# Altium PCB 驱动.PcbDoc (part 2 of 3)
Units mm, origin at the board's own origin, x right, y up, seen from the top; angles counter-clockwise.
Board outline 185 x 120 mm, 2 copper layers (Top Layer, Bottom Layer); 132 components, 68 nets, 349 pads, 106 vias.
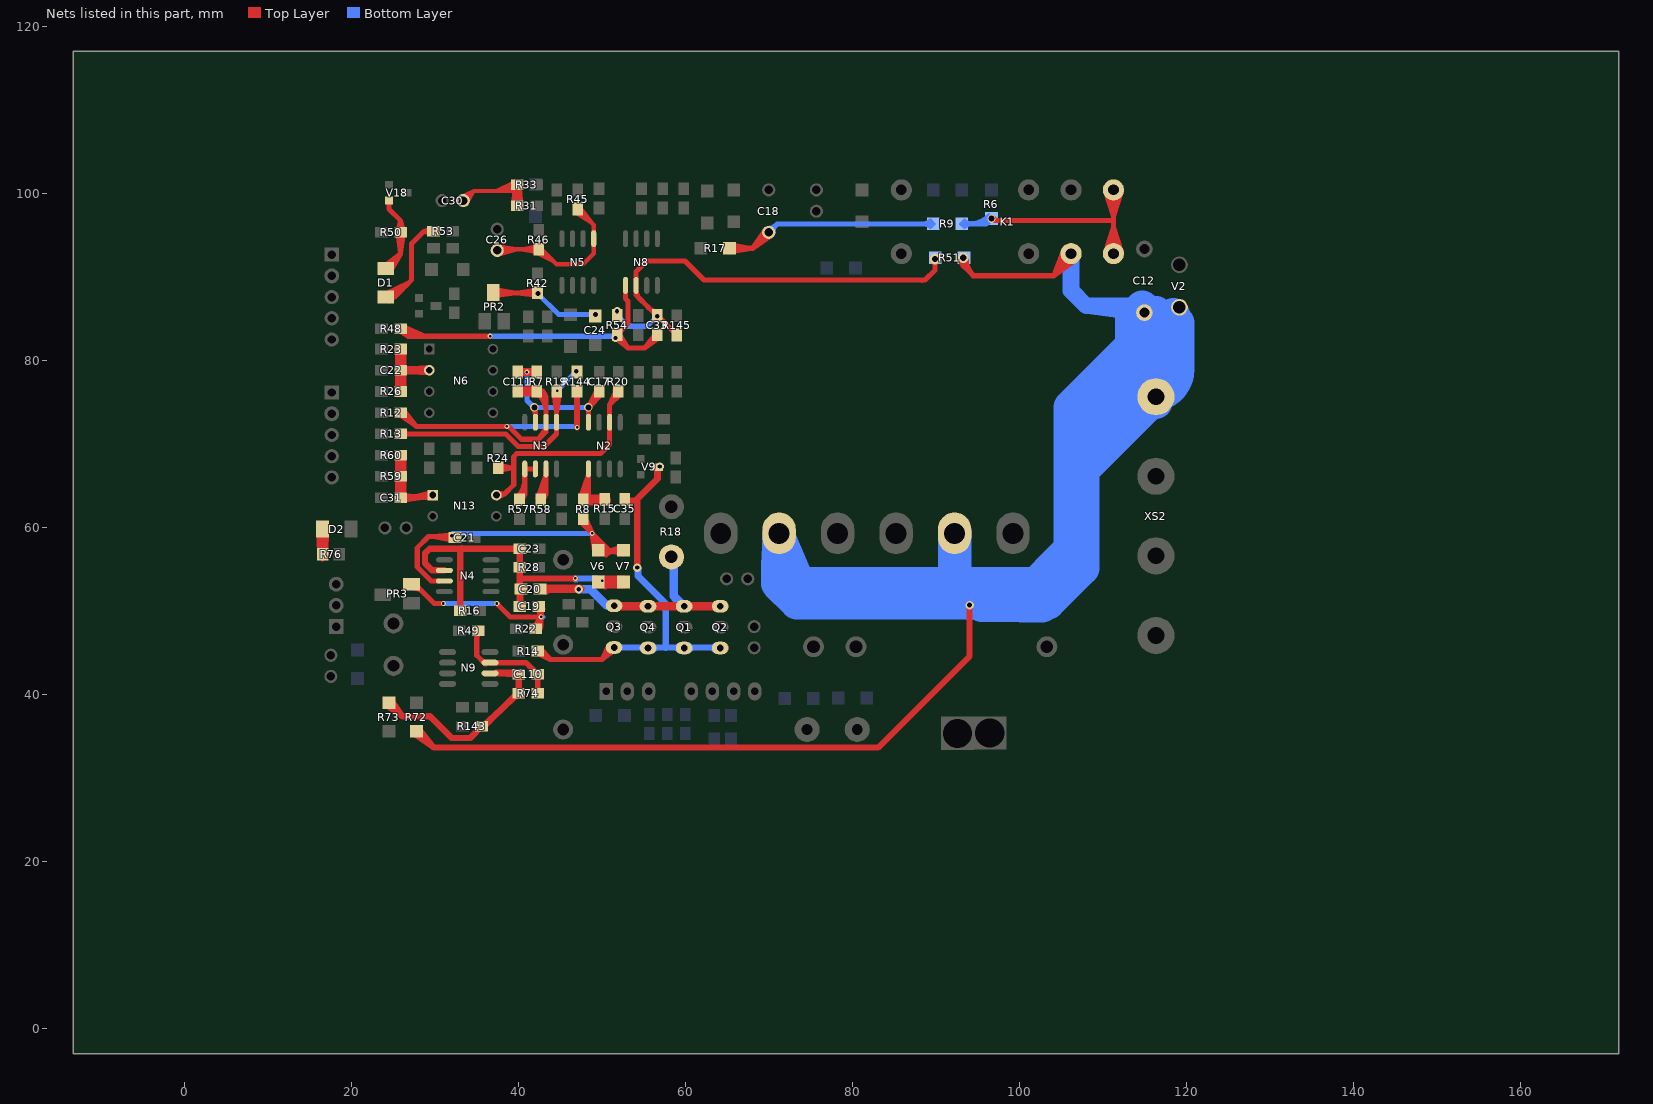
[diagram p2: the nets of this part, all layers, seen from the top]

## Via types
v1: diameter 1.016, hole 0.711, Top Layer to Bottom Layer, 31 vias
v2: diameter 1, hole 0.5, Top Layer to Bottom Layer, 28 vias
v3: diameter 0.6, hole 0.3, Top Layer to Bottom Layer, 23 vias
v4: diameter 1, hole 0.6, Top Layer to Bottom Layer, 5 vias
v5: diameter 1.016, hole 0.635, Top Layer to Bottom Layer, 4 vias
v6: diameter 1.2, hole 0.6, Top Layer to Bottom Layer, 4 vias
v7: diameter 1.1, hole 0.6, Top Layer to Bottom Layer, 3 vias
v8: diameter 0.8, hole 0.4, Top Layer to Bottom Layer, 2 vias
v9: diameter 1.27, hole 0.762, Top Layer to Bottom Layer, 2 vias
v10: diameter 0.8, hole 0.5, Top Layer to Bottom Layer, 2 vias
v11: diameter 1.27, hole 0.889, Top Layer to Bottom Layer, 1 vias
v12: diameter 1.27, hole 0.711, Top Layer to Bottom Layer, 1 vias

## Nets (pads, with @x,y where several pads share a name; then routed paths per layer and width w, separated by ;. In a path a pad name is that pad's centre, name@x,y a point inside that pad or via, vN(x,y) a via of type N, cw(c..) or ccw(c..) an arc to the next point about the centre after c; other vN are vias at no path point) (continued)
LD-: C12.2 K1.1 pad.5 pad.8 R51.2 R72.2 V2.A XS2.1 | length 604.6
  Top Layer w0.635: v9@92.933,92.302 ccw(c94.443,92.293) 93.375,91.225 ; v9@93.025,92.075 cw(c92.483,91.533) 93.25,91.533 cw(c94.017,91.533) v9@93.475,92.075 ; v9(93.25,92.3) 93.25,91.35 94.45,90.15 ; v9@93.567,92.298 ccw(c96.58,92.281) 94.45,90.15 ; 104.095,90.145 ccw(c101.444,92.795) K1.1@105.193,92.795 ; 105.179,91.229 ccw(c103.612,92.795) K1.1@105.828,92.795 ; K1.1@105.316,93.264 104.1,90.15 ; K1.1@106.808,92.111 104.1,90.15 ; 94.45,90.15 104.1,90.15 ; 104.1,90.15 106.145,92.195 K1.1@106.145,92.795 104.1,90.15 ; 105.543,91.593 cw(c106.145,90.991) K1.1@106.145,91.842 ; 105.543,91.593 cw(c106.145,90.991) K1.1@106.145,91.842 ; 105.543,91.593 cw(c106.145,90.991) K1.1@106.145,91.842 ; 104.4,90.45 ccw(c102.439,92.411) 105.198,92.697 cw(c102.439,92.411) 104.4,90.45 ; 105.343,91.393 ccw(c104.148,92.588) 105.829,92.762 cw(c104.148,92.588) 105.343,91.393
  Top Layer w0.7: R72.2@27.515,35.271 29.855,33.645 ; R72.2@27.774,35.592 29.855,33.645 ; R72.2@27.9,35.6 29.855,33.645 ; R72.2@28.077,35.871 29.855,33.645 ; v4(94,50.7) 94,44.6 83.045,33.645 29.855,33.645 ; R72.2@27.774,35.18 cw(c27.774,33.861) 28.706,34.794 ccw(c27.774,33.861) R72.2@27.774,35.18 ; R72.2@28.186,35.592 ccw(c28.858,35.592) 28.383,35.117 cw(c28.858,35.592) R72.2@28.186,35.592
  Bottom Layer w2: 108.148,86.55 C12.2@115.316,85.598 ; 116.25,86.55 107.95,86.55 106.145,88.355 ; 106.145,88.355 K1.1@106.145,92.795 106.145,88.355 ; C12.2@115.316,85.598 ccw(c113.018,83.3) 113.018,86.55 cw(c113.018,83.3) C12.2@115.316,85.598
  Bottom Layer w4: 73.813,52.991 cw(c80.123,59.3) pad.5@71.2,59.3 ; 77.603,50.983 81.8,50.983 ; pad.8@92.2,58.8 92.2,53.383 ; pad.8@92.2,59.3 92.2,53.383 ; 95.237,50.9 95.437,50.7 100.146,50.7 100.246,50.6 102.7,50.6 103.1,51 ; 100.9,53.283 92.1,53.283 ; 108.812,70.062 109.701,70.951 ; 111.153,79.077 cw(c109.789,71.92) XS2.1@116.112,75.539 ; C12.2@114.156,85.808 ccw(c117.086,83.603) 113.419,83.603 cw(c117.086,83.603) C12.2@114.652,86.346 ; XS2.1@116.305,75.015 XS2.1@116.305,75.65 ; 116.313,85.717 cw(c114.095,85.598) 115.665,84.027 ccw(c114.095,85.598) 116.316,85.598 ; 118.2,84.6 C12.2@115.316,85.598 ; 118.404,85.464 cw(c109.503,82.452) XS2.1@116.148,75.807 ; 71,53.3 73.3,51 88.974,51 ; 71,53.3 71,55.404 ; 71,53.3 pad.5@71.2,58.8 ; 71,55.404 pad.5@71.2,58.8 ; 71,55.404 71.2,55.604 ; 71,55.404 pad.5@71.2,58.8 ; 71.2,55.604 73.521,53.283 ; 71.2,55.604 pad.5@71.2,58.8 ; 71.2,55.604 pad.5@71.2,58.8 ; 71.2,55.604 pad.5@71.2,58.8 ; 71.2,55.604 pad.5@71.2,59.3 ; pad.5@71.2,58.8 73.521,53.283 ; pad.5@71.2,59.3 ccw(c79.147,58.909) 73.521,53.283 ; 73.521,53.283 75.03,51.774 88.2,51.774 ; 73.521,53.283 92.1,53.283 ; 88.2,51.774 100.43,51.774 ; 88.2,51.774 88.974,51 ; 88.974,51 103.1,51 ; 92.1,53.283 92.2,53.383 ; 100.43,51.774 102.208,51.774 103.717,53.283 ; 100.43,51.774 106.018,57.362 ; 103.1,51 103.4,51 106.018,53.618 ; 103.1,51 103.717,51.617 103.717,53.283 ; 103.717,53.283 106.018,55.584 ; 106.018,53.618 106.018,55.584 ; 106.018,53.618 107.542,55.142 107.542,57.108 ; 106.018,55.584 107.542,57.108 ; 106.018,55.584 106.018,57.362 ; 106.018,57.362 106.018,74.38 110.844,79.206 ; 107.542,57.108 107.542,66.887 ; 107.542,66.887 XS2.1@116.305,75.65 ; 107.542,66.887 XS2.1@116.305,75.65 ; 109.701,70.951 111.352,72.602 111.352,75.65 ; 109.701,70.951 109.701,73.999 111.352,75.65 ; 110.844,79.206 cw(c110.844,73.593) 116.097,75.572 ccw(c110.844,73.593) 110.844,79.206 ; 110.844,79.206 116.305,79.206 ; 110.844,79.206 113.419,81.781 ; 110.844,79.206 XS2.1@116.305,75.65 ; 111.352,75.65 XS2.1@116.305,75.65 ; 113.419,81.781 C12.2@115.316,85.598 ; 113.419,81.781 113.419,84.98 C12.2@115.316,85.598 ; 113.419,81.781 116.178,84.54 116.305,84.54 116.305,82.45 ; 113.419,81.781 C12.2@115.316,85.598 ; C12.2@115.316,85.598 116.305,82.45 ; XS2.1@116.148,75.807 ccw(c109.503,82.452) 118.9,82.452 cw(c109.503,82.452) XS2.1@116.148,75.807 ; XS2.1@116.273,75.87 ccw(c115.839,78.9) 118.9,78.9 ; XS2.1@116.273,75.87 ccw(c115.839,78.9) 118.9,78.9 ; XS2.1@116.273,75.87 ccw(c115.839,78.9) 118.9,78.9 ; XS2.1@116.305,75.65 118.9,83.9 ; XS2.1@116.305,75.65 XS2.1@116.305,76.305 ; XS2.1@116.305,75.65 116.305,79.206 ; XS2.1@116.305,75.65 118.9,78.9 ; XS2.1@116.305,75.65 118.9,78.9 ; XS2.1@116.305,75.65 116.305,79.206 ; XS2.1@116.305,76.305 118.9,78.9 ; XS2.1@116.305,76.305 116.305,79.206 ; 116.305,79.206 116.305,82.45 ; 116.305,82.45 117.2,82.45 117.2,82.8 ; 117.2,82.8 118.9,84.5 118.9,78.9 ; 117.2,82.8 118.6,84.2 118.9,83.9 ; 118.9,78.9 118.9,83.9 ; 113.419,83.433 cw(c117.481,83.433) 114.609,86.305 ccw(c117.481,83.433) 113.419,83.433
LD-1: K1.0@111.225,92.795 K1.2 R6.2 R9.2 | length 96
  Top Layer w0.61: v1@96.764,97.13 ccw(c97.724,98.09) 97.724,96.732 ; v1@96.874,96.732 107.034,96.732 ; 109.193,96.732 107.034,96.732 ; K1.0@110.272,92.945 111.225,95.894 ; K1.2@110.272,100.265 111.225,97.316 ; K1.0@110.87,92.815 111.225,95.894 ; K1.2@110.87,100.395 111.225,97.316 ; 110.971,96.732 107.034,96.732 ; K1.0@111.225,92.795 111.225,100.425 K1.2@111.4,100.6 ; K1.2@111.225,100.415 111.225,97.316 ; K1.0@111.58,92.815 111.225,95.894 ; K1.2@111.58,100.395 111.225,97.316 ; K1.0@112.178,92.945 111.225,95.894 ; K1.2@112.178,100.265 111.225,97.316 ; K1.0@110.543,93.477 ccw(c108.895,95.125) 111.225,95.125 ; K1.0@110.543,93.477 ccw(c108.895,95.125) 111.225,95.125 ; K1.0@110.543,93.477 ccw(c108.895,95.125) 111.225,95.125 ; K1.2@110.543,99.732 cw(c108.895,98.085) 111.225,98.085 ; K1.2@110.543,99.732 cw(c108.895,98.085) 111.225,98.085 ; K1.2@110.543,99.732 cw(c108.895,98.085) 111.225,98.085 ; 111.225,95.125 ccw(c113.555,95.125) K1.0@111.908,93.477 ; 111.225,95.125 ccw(c113.555,95.125) K1.0@111.908,93.477 ; 111.225,95.125 ccw(c113.555,95.125) K1.0@111.908,93.477 ; 111.225,98.085 cw(c113.555,98.085) K1.2@111.908,99.732 ; 111.225,98.085 cw(c113.555,98.085) K1.2@111.908,99.732 ; 111.225,98.085 cw(c113.555,98.085) K1.2@111.908,99.732
  Bottom Layer w0.61: R9.2@93.064,96.351 95.985,96.351 v1(96.62,96.986) ; R9.2@93.387,96.028 cw(c94.168,95.247) 94.168,96.351 ; R9.2@93.387,96.028 cw(c94.168,95.247) 94.168,96.351 ; R9.2@93.387,96.028 cw(c94.168,95.247) 94.168,96.351 ; R9.2@93.387,96.674 ccw(c94.168,97.455) 94.168,96.351 ; R9.2@93.387,96.674 ccw(c94.168,97.455) 94.168,96.351 ; R9.2@93.387,96.674 ccw(c94.168,97.455) 94.168,96.351 ; 93.983,96.351 ccw(c93.983,99.623) R6.2@96.297,97.309 ; 93.983,96.351 ccw(c93.983,99.623) R6.2@96.297,97.309 ; 93.983,96.351 ccw(c93.983,99.623) R6.2@96.297,97.309 ; 95.455,96.351 ccw(c95.455,98.151) R6.2@96.728,96.878 ; 95.455,96.351 ccw(c95.455,98.151) R6.2@96.728,96.878 ; 95.455,96.351 ccw(c95.455,98.151) R6.2@96.728,96.878
NetC17_1: C17.1 C111.2 N2.8 N3.7 R7.1 | length 33
  Top Layer w0.61: v1@41.739,74.236 cw(c41.086,73.583) N3.7@42.01,73.583 ; N3.7@42.01,72.602 42.01,73.999 N3.7@42.01,73.313 ; N2.8@48.36,73.14 v1(48.36,74.38) ; N2.8@48.36,73.313 v1(48.36,74.38) ; C17.1@49.388,76.347 v1(48.36,74.38) ; C17.1@49.668,76.1 C17.1@49.668,76.3 ; C17.1@49.668,76.173 v1(48.36,74.38) ; C17.1@49.7,76.1 49.7,75.72 v1(48.36,74.38) ; C17.1@49.92,75.959 v1(48.36,74.38) ; 48.761,74.781 ccw(c47.37,76.173) 49.338,76.173 cw(c47.37,76.173) 48.761,74.781
  Top Layer w1: R7.1@42.087,78.613 C111.2@39.878,78.613 R7.1@42.164,78.613
  Bottom Layer w0.61: v3(41,78.6) 41,75.2 v1@41.9,74.3 ; v1(41.883,74.38) v1(48.36,74.38)
NetC18_1: C18.1 R9.1 R17.2 | length 59.8
  Top Layer w0.61: R17.2@65.251,93.43 68.045,93.43 ; R17.2@65.291,92.975 67.842,93.43 R17.2@65.291,93.885 ; C18.1@69.58,95.644 68.045,93.43 ; C18.1@69.95,95.335 68.045,93.43 ; C18.1@70.259,94.965 68.045,93.43 ; R17.2@65.574,93.107 cw(c66.355,92.326) 66.355,93.43 ; R17.2@65.574,93.107 cw(c66.355,92.326) 66.355,93.43 ; R17.2@65.574,93.107 cw(c66.355,92.326) 66.355,93.43 ; R17.2@65.574,93.753 ccw(c66.355,94.534) 66.355,93.43 ; R17.2@65.574,93.753 ccw(c66.355,94.534) 66.355,93.43 ; R17.2@65.574,93.753 ccw(c66.355,94.534) 66.355,93.43 ; 69.126,94.511 cw(c69.95,93.687) C18.1@69.95,94.852 ; 69.126,94.511 ccw(c68.302,95.335) C18.1@69.467,95.335 ; 69.126,94.511 cw(c69.95,93.687) C18.1@69.95,94.852 ; 69.126,94.511 ccw(c68.302,95.335) C18.1@69.467,95.335 ; 69.126,94.511 ccw(c68.302,95.335) C18.1@69.467,95.335 ; 69.126,94.511 cw(c69.95,93.687) C18.1@69.95,94.852
  Bottom Layer w0.61: C18.1@69.95,95.335 70.966,96.351 84.55,96.351 ; 82.269,96.351 84.55,96.351 ; R9.1@89.635,96.351 84.55,96.351 ; C18.1@69.95,95.818 ccw(c69.95,96.983) 70.774,96.159 ; C18.1@69.95,95.818 ccw(c69.95,96.983) 70.774,96.159 ; C18.1@69.95,95.818 ccw(c69.95,96.983) 70.774,96.159 ; C18.1@70.433,95.335 cw(c71.598,95.335) 70.774,96.159 ; C18.1@70.433,95.335 cw(c71.598,95.335) 70.774,96.159 ; C18.1@70.433,95.335 cw(c71.598,95.335) 70.774,96.159 ; 88.531,96.351 cw(c88.531,95.247) R9.1@89.312,96.028 ; 88.531,96.351 ccw(c88.531,97.455) R9.1@89.312,96.674 ; 88.531,96.351 cw(c88.531,95.247) R9.1@89.312,96.028 ; 88.531,96.351 ccw(c88.531,97.455) R9.1@89.312,96.674 ; 88.531,96.351 ccw(c88.531,97.455) R9.1@89.312,96.674 ; 88.531,96.351 cw(c88.531,95.247) R9.1@89.312,96.028
NetC19_1: C19.1 PR3.1 R22.2 | length 36.8
  Top Layer w0.6: v3(37.4,50.9) 39.016,49.284 42.672,49.284 v3@42.684,49.284
  Top Layer w0.61: PR3.1@27.178,53.213 27.587,53.213 29.9,50.9 v3@30.9,50.9 ; R22.2@41.868,48.025 v3@42.672,49.284 ; R22.2@42.007,48.17 ccw(c41.406,49.284) v3@42.672,49.284 ; R22.2@42.164,47.879 v3@42.672,49.284 ; R22.2@42.185,48.113 ccw(c41.021,49.284) v3@42.672,49.284 ; C19.1@42.224,50.47 v3@42.672,49.284 ; R22.2@42.297,47.633 ccw(c41.957,48.262) R22.2@42.672,48.262 ; C19.1@42.312,50.313 cw(c41.441,49.442) v3@42.672,49.442 ; C19.1@42.462,50.24 cw(c41.953,49.731) 42.672,49.731 ; R22.2@42.485,47.802 v3@42.672,49.284 ; C19.1@42.545,50.546 v3@42.672,49.284 ; R22.2@42.672,48.133 v3@42.672,49.284 ; 42.672,49.62 cw(c43.548,49.62) C19.1@42.928,50.24 ; C19.1@42.728,50.428 42.672,50.428 v3@42.672,49.284 ; C19.1@42.875,50.536 v3@42.672,49.284 ; PR3.1@27.428,52.768 cw(c27.428,51.309) 28.459,52.341 ccw(c27.428,51.309) PR3.1@27.428,52.768 ; PR3.1@27.873,53.213 ccw(c28.564,53.213) 28.076,52.724 cw(c28.564,53.213) PR3.1@27.873,53.213
  Bottom Layer w0.61: v3(31,50.9) v3(37.4,50.9) ; v3@42.8,49.2 v3@42.9,49.3
  other v3: 42.7,49.3
NetC19_2: C19.2 C20.2 C23.2 N4.2 R16.2 R28.2 V6.K V7.A | length 117.4
  Top Layer w0.76: N4.2@30.404,54.864 29.636,54.864 ; N4.2@31.115,54.864 29.636,54.864 ; R16.2@33.02,50.038 33.02,57.32 33.158,57.458 ; 33.2,57.5 33.158,57.458 ; 37.113,57.458 C23.2@40.028,57.458 ; C19.2@39.952,50.726 ccw(c39.461,51.217) 40.155,51.217 ; v3(46.8,53.9) 43.594,53.9 43.593,53.901 40.256,53.901 40.155,53.8 ; V6.K@49.806,53.743 ccw(c50.995,54.932) 50.995,53.25 ; 50.39,52.974 cw(c51.056,52.308) 51.056,53.25 cw(c51.056,54.192) 50.39,53.526 ; 51.113,53.25 ccw(c51.113,54.932) V7.A@52.302,53.743 ; 51.621,53.25 ccw(c51.621,54.932) V7.A@52.81,53.743 ; V7.A@52.503,53.084 V6.K@49.581,53.854 ; V7.A@52.504,53.85 V6.K@49.527,53.077 ; V7.A@52.513,53.852 V6.K@50.114,53.25 ; V7.A@52.553,53.078 V6.K@49.53,53.467 ; V7.A@52.553,53.856 V6.K@49.53,53.467 ; V7.A@52.581,53.077 V6.K@50.114,53.25 ; V7.A@52.603,53.078 V6.K@49.527,53.077 ; V7.A@52.603,53.856 V6.K@49.581,53.854 ; V7.A@52.7,53.25 V6.K@50.114,53.25 ; 29.636,54.864 28.8,55.7 28.8,56.9 29.358,57.458 33.158,57.458 ; 33.158,57.458 C23.2@40.155,57.458 ; R28.2@40.132,55.245 40.155,57.355 40.155,53.8 ; R28.2@40.132,55.245 40.155,53.8 ; R28.2@40.132,55.245 C23.2@40.155,57.458 ; R28.2@40.132,55.245 40.155,54.543 C23.2@40.155,57.458 ; 40.155,53.8 40.155,50.445 C20.2@40.282,52.632 C19.2@40.132,50.546 40.155,53.461 40.155,52.632 40.155,53.8 ; V6.K@49.527,53.077 V7.A@52.642,53.25 ; V6.K@49.527,53.077 V7.A@52.578,53.467 ; V6.K@49.53,53.467 V7.A@52.642,53.25 ; V6.K@49.53,53.467 V7.A@52.578,53.467 ; V6.K@49.581,53.854 V7.A@52.642,53.25 ; V6.K@49.581,53.854 V7.A@52.578,53.467 ; V6.K@50.114,53.25 V7.A@52.578,53.467 ; R28.2@39.952,55.065 cw(c39.461,54.574) 40.155,54.574 ccw(c39.461,54.574) R28.2@39.952,55.065 ; R28.2@39.952,55.425 ccw(c39.461,55.916) 40.155,55.916 cw(c39.461,55.916) R28.2@39.952,55.425
  Bottom Layer w0.76: v3@46.8,53.8 v3@46.9,53.8 ; v3(46.8,53.9) v3@46.9,53.8 ; v3(50,53.6) 49.9,53.6 49.6,53.9 46.9,53.9 v3@46.9,53.8
NetC20_1: C20.1 Q1.3 Q2.3 Q3.3 Q4.3 R18.1 | length 69.3
  Top Layer w1.016: C20.1@42.695,52.632 46.381,52.658 ; C20.1@42.785,52.722 ccw(c43.32,53.257) C20.1@43.32,52.5 ; C20.1@43.1,52.5 43.258,52.658 v2@47.373,52.658 ; Q3.3@51.5,50.6 Q3.3@51.529,50.571 ; Q4.3@55.484,50.571 51.685,50.633 55.249,50.571 Q3.3@51.529,50.571 ; Q4.3@55.769,50.571 Q1.3@59.567,50.571 ; Q1.3@59.9,50.5 Q1.3@59.937,50.537 ; Q1.3@60.067,50.571 Q2.3@63.865,50.571 ; Q2.3@64.135,50.571 Q4.3@55.499,50.571 Q3.3@51.529,50.571 ; Q4.3@55.749,50.571 59.547,50.571 Q4.3@55.749,50.571 ; Q1.3@60.087,50.571 63.885,50.571 Q1.3@60.087,50.571
  Bottom Layer w1.016: v2(47.2,52.6) 48.6,52.6 50.5,50.7 Q3.3@50.6,50.7 ; 50.4,50.9 Q3.3@50.6,50.7 ; Q3.3@51.435,50.633 50.667,50.633 Q3.3@50.6,50.7 ; R18.1@58.5,56.3 58.6,56.2 58.6,51.788 ; 58.977,51.411 cw(c58.137,50.571) Q1.3@59.325,50.571 ; Q1.3@59.567,50.571 58.6,51.788 ; Q1.3@59.817,50.571 58.6,51.788
NetC21_1: C21.1 N4.3 R8.1 V6.A V7.K | length 86.4
  Top Layer w0.61: N4.3@30.404,53.594 29.534,53.6 ; N4.3@30.5,53.6 29.534,53.6 ; C21.1@32.219,58.473 29.788,58.928 ; C21.1@32.253,59.131 29.788,58.928 ; C21.1@32.258,58.801 29.788,58.928 ; C21.1@32.385,58.928 29.228,58.928 27.861,57.561 27.861,55.272 29.534,53.6 ; R8.1@47.466,60.713 v3(48.8,59.3) ; R8.1@47.6,60.9 47.6,60.5 v3(48.8,59.3) ; R8.1@47.725,60.918 v3(48.8,59.3) ; R8.1@48.015,61.077 v3(48.8,59.3) ; v3@48.665,59.435 cw(c46.29,57.06) V6.A@49.649,57.06 ; 49.048,59.052 cw(c47.503,57.508) V6.A@49.673,57.261 ; V6.A@49.078,57.167 v3(48.8,59.3) ; V6.A@49.207,57.958 cw(c49.633,57.059) 50.337,57.763 ; V6.A@49.468,57.407 cw(c50.027,56.23) 50.948,57.152 ; V6.A@49.578,56.814 50.913,57.187 ; V6.A@49.638,57.73 50.913,57.187 ; 49.706,58.394 cw(c48.371,57.06) V6.A@50.258,57.06 ; 49.941,58.159 cw(c49.108,57.325) V6.A@50.279,57.192 ; V6.A@49.948,57.481 v3(48.8,59.3) ; V6.A@50.013,57.163 cw(c50.475,56.693) 50.941,57.159 ; V6.A@50.114,57.06 V6.A@50.154,57.1 ; 50.443,56.731 cw(c51.544,55.63) 51.544,57.187 ; 50.443,57.389 ccw(c50.93,57.876) 50.93,57.187 ; 50.448,57.384 ccw(c50.913,57.835) 50.913,57.187 ; 50.559,56.925 cw(c50.913,56.817) 50.913,57.187 ; 51.238,57.187 ccw(c51.238,58.617) V7.K@52.249,57.606 ; 51.672,57.187 cw(c51.672,56.371) V7.K@52.249,56.948 ; 51.746,57.187 ccw(c51.746,58.617) V7.K@52.757,57.606 ; V7.K@52.18,57.187 cw(c52.18,56.371) V7.K@52.757,56.948 ; V7.K@52.488,57.733 50.913,57.187 ; V7.K@52.538,56.814 50.913,57.187 ; V7.K@52.578,57.277 50.913,57.187 ; V7.K@52.9,57.187 50.913,57.187 ; v3(48.8,59.3) 50.913,57.187 ; v3(48.8,59.3) V6.A@49.53,57.277 50.913,57.187 ; 31.154,58.928 cw(c31.154,57.697) 32.025,58.568 ccw(c31.154,57.697) 31.154,58.928 ; R8.1@48.054,60.887 ccw(c49.692,60.735) 48.528,59.572 cw(c49.692,60.735) R8.1@48.054,60.887
  Bottom Layer w0.61: v8@32.1,59.3 v3(48.8,59.3)
  other v8: 32,59
NetC22_2: C22.2 N6.2 R23.1 R26.2 | length 119.1
  Top Layer w0.61: R26.2@25.424,76.281 C22.2@25.561,78.733 ; R23.1@25.424,81.369 C22.2@25.561,78.917 ; R26.2@25.552,76.307 25.881,78.749 R26.2@26.21,76.307 ; C22.2@25.552,78.803 25.881,76.361 C22.2@26.21,78.803 ; C22.2@25.552,78.847 25.881,81.289 C22.2@26.21,78.847 ; R23.1@25.552,81.343 25.881,78.901 R23.1@26.21,81.343 ; R26.2@25.681,76.333 C22.2@26.201,78.733 ; R23.1@25.681,81.317 C22.2@26.201,78.917 ; R26.2@25.754,76.285 C22.2@25.561,78.733 ; R23.1@25.754,81.365 C22.2@25.561,78.917 ; R26.2@25.881,76.285 R23.1@25.881,81.365 ; C22.2@25.881,78.825 N6.2@29.31,78.825 ; R26.2@26.008,76.285 C22.2@26.201,78.733 ; C22.2@26.008,78.825 28.472,78.825 ; R23.1@26.008,81.365 C22.2@26.201,78.917 ; C22.2@26.03,78.496 28.472,78.825 ; C22.2@26.03,79.154 28.472,78.825 ; R26.2@26.081,76.333 C22.2@25.561,78.733 ; R23.1@26.081,81.317 C22.2@25.561,78.917 ; R26.2@26.338,76.281 C22.2@26.201,78.733 ; R23.1@26.338,81.369 C22.2@26.201,78.917 ; N6.2@29.259,78.499 26.844,79.045 ; N6.2@29.259,79.151 26.834,78.604 ; N6.2@29.317,78.495 26.834,78.604 ; N6.2@29.317,79.155 26.844,79.045 ; R26.2@25.648,76.518 ccw(c25.084,77.082) 25.881,77.082 ; R26.2@25.648,76.518 ccw(c25.084,77.082) 25.881,77.082 ; R26.2@25.648,76.518 ccw(c25.084,77.082) 25.881,77.082 ; C22.2@25.648,78.592 cw(c25.084,78.028) 25.881,78.028 ; C22.2@25.648,78.592 cw(c25.084,78.028) 25.881,78.028 ; C22.2@25.648,78.592 cw(c25.084,78.028) 25.881,78.028 ; C22.2@25.648,79.058 ccw(c25.084,79.622) 25.881,79.622 ; C22.2@25.648,79.058 ccw(c25.084,79.622) 25.881,79.622 ; C22.2@25.648,79.058 ccw(c25.084,79.622) 25.881,79.622 ; R23.1@25.648,81.132 cw(c25.084,80.568) 25.881,80.568 ; R23.1@25.648,81.132 cw(c25.084,80.568) 25.881,80.568 ; R23.1@25.648,81.132 cw(c25.084,80.568) 25.881,80.568 ; 25.881,77.082 ccw(c26.678,77.082) R26.2@26.114,76.518 ; 25.881,77.082 ccw(c26.678,77.082) R26.2@26.114,76.518 ; 25.881,77.082 ccw(c26.678,77.082) R26.2@26.114,76.518 ; 25.881,78.028 cw(c26.678,78.028) C22.2@26.114,78.592 ; 25.881,78.028 cw(c26.678,78.028) C22.2@26.114,78.592 ; 25.881,78.028 cw(c26.678,78.028) C22.2@26.114,78.592 ; 25.881,79.622 ccw(c26.678,79.622) C22.2@26.114,79.058 ; 25.881,79.622 ccw(c26.678,79.622) C22.2@26.114,79.058 ; 25.881,79.622 ccw(c26.678,79.622) C22.2@26.114,79.058 ; 25.881,80.568 cw(c26.678,80.568) R23.1@26.114,81.132 ; 25.881,80.568 cw(c26.678,80.568) R23.1@26.114,81.132 ; 25.881,80.568 cw(c26.678,80.568) R23.1@26.114,81.132 ; C22.2@26.241,78.592 cw(c26.805,78.028) 26.805,78.825 ; C22.2@26.241,78.592 cw(c26.805,78.028) 26.805,78.825 ; C22.2@26.241,78.592 cw(c26.805,78.028) 26.805,78.825 ; C22.2@26.241,79.058 ccw(c26.805,79.622) 26.805,78.825 ; C22.2@26.241,79.058 ccw(c26.805,79.622) 26.805,78.825 ; C22.2@26.241,79.058 ccw(c26.805,79.622) 26.805,78.825 ; 26.834,78.604 N6.2@29.31,78.825 ; 26.844,79.045 N6.2@29.31,78.825 ; 26.846,78.825 29.288,78.496 26.846,78.825 ; 26.846,78.825 29.288,79.154 26.846,78.825 ; 28.472,78.825 N6.2@29.245,78.501 ; 28.472,78.825 N6.2@29.245,79.149 ; 28.472,78.825 N6.2@29.31,78.825 ; 28.472,78.825 N6.2@29.245,78.501 ; 28.472,78.825 N6.2@29.245,79.149 ; 28.472,78.825 N6.2@29.31,78.825 ; 28.472,78.825 N6.2@29.245,78.501 ; 28.472,78.825 N6.2@29.245,79.149 ; 28.513,78.825 cw(c28.513,78.028) N6.2@29.077,78.592 ; 28.513,78.825 ccw(c28.513,79.622) N6.2@29.077,79.058 ; 28.513,78.825 cw(c28.513,78.028) N6.2@29.077,78.592 ; 28.513,78.825 ccw(c28.513,79.622) N6.2@29.077,79.058 ; 28.513,78.825 ccw(c28.513,79.622) N6.2@29.077,79.058 ; 28.513,78.825 cw(c28.513,78.028) N6.2@29.077,78.592
NetC24_2: C24.2 PR2.W R42.2 | length 34.7
  Top Layer w0.61: PR2.W@36.957,88.138 39.538,88.096 ; PR2.W@36.988,87.694 39.538,88.096 ; PR2.W@37.003,88.581 39.538,88.096 ; PR2.W@37.184,88.35 37.438,88.096 R42.2@42.264,88.096 R42.2@42.264,87.986 ; PR2.W@37.499,87.785 cw(c38.249,87.035) 38.249,88.096 ; PR2.W@37.499,88.415 ccw(c38.268,89.184) 38.268,88.096 ; R42.2@42.242,87.767 39.8,88.096 R42.2@42.242,88.425 ; 41.467,88.096 cw(c41.467,87.299) R42.2@42.031,87.863 ; 41.467,88.096 ccw(c41.467,88.893) R42.2@42.031,88.329 ; 41.467,88.096 cw(c41.467,87.299) R42.2@42.031,87.863 ; 41.467,88.096 ccw(c41.467,88.893) R42.2@42.031,88.329 ; 41.467,88.096 ccw(c41.467,88.893) R42.2@42.031,88.329 ; 41.467,88.096 cw(c41.467,87.299) R42.2@42.031,87.863 ; PR2.W@37.272,87.823 cw(c37.93,87.165) 37.93,88.096 ccw(c37.93,87.165) PR2.W@37.272,87.823 ; PR2.W@37.272,88.453 ccw(c38.133,89.314) 38.133,88.096 cw(c38.133,89.314) PR2.W@37.272,88.453
  Bottom Layer w0.61: v4(42.3,88) 44.8,85.5 v4(49.2,85.5)
NetC26_2: C26.2 N5.5 R45.2 R46.2 | length 67.9
  Top Layer w0.508: C26.2@37.438,93.176 39.763,93.303 ; C26.2@37.47,93.708 39.763,93.303 ; C26.2@37.528,92.65 39.763,93.303 ; C26.2@37.819,93.303 R46.2@42.391,93.303 ; R46.2@42.193,92.85 44.25,91.825 ; R46.2@42.357,92.923 40.232,93.303 R46.2@42.357,93.683 ; R46.2@42.391,93.176 44.25,91.825 ; R46.2@42.391,93.684 44.55,91.525 47.725,91.525 48.995,92.795 ; R46.2@42.64,93.465 44.25,91.825 ; R45.2@46.855,97.702 48.803,96.416 ; R45.2@47.09,98.002 48.803,96.416 ; R45.2@47.09,98.129 48.995,96.224 ; R45.2@47.371,98.26 48.803,96.416 ; N5.5@48.995,93.862 48.995,92.795 ; N5.5@48.995,95.284 48.995,96.224 ; C26.2@37.815,92.799 cw(c39.032,91.582) 39.032,93.303 ; C26.2@37.815,92.799 cw(c39.032,91.582) 39.032,93.303 ; C26.2@37.815,92.799 cw(c39.032,91.582) 39.032,93.303 ; C26.2@37.815,93.553 ccw(c38.419,94.157) 38.419,93.303 ; C26.2@37.815,93.553 ccw(c38.419,94.157) 38.419,93.303 ; C26.2@37.815,93.553 ccw(c38.419,94.157) 38.419,93.303 ; 41.471,93.303 cw(c41.471,92.383) R46.2@42.122,93.034 ; 41.471,93.303 ccw(c41.471,94.223) R46.2@42.122,93.572 ; 41.471,93.303 cw(c41.471,92.383) R46.2@42.122,93.034 ; 41.471,93.303 ccw(c41.471,94.223) R46.2@42.122,93.572 ; 41.471,93.303 ccw(c41.471,94.223) R46.2@42.122,93.572 ; 41.471,93.303 cw(c41.471,92.383) R46.2@42.122,93.034 ; R46.2@42.391,92.795 cw(c42.391,90.649) 43.909,92.166 ; R46.2@42.391,92.795 cw(c42.391,90.649) 43.909,92.166 ; R46.2@42.391,92.795 cw(c42.391,90.649) 43.909,92.166 ; R46.2@42.391,93.303 cw(c42.391,92.383) 43.041,93.034 ; R46.2@42.391,93.303 cw(c42.391,92.383) 43.041,93.034 ; R46.2@42.391,93.303 cw(c42.391,92.383) 43.041,93.034 ; R45.2@47.09,97.621 cw(c47.09,96.395) 47.957,97.262 ; R45.2@47.09,97.621 cw(c47.09,96.395) 47.957,97.262 ; R45.2@47.09,97.621 cw(c47.09,96.395) 47.957,97.262 ; R45.2@47.471,98.002 ccw(c48.084,98.002) R45.2@47.651,97.568 ; R45.2@47.471,98.002 ccw(c48.084,98.002) R45.2@47.651,97.568 ; R45.2@47.471,98.002 ccw(c48.084,98.002) R45.2@47.651,97.568 ; 48.995,92.795 N5.5@48.995,94.573 48.995,96.224
NetC30_1: C30.1 R31.2 R33.1 | length 79.5
  Top Layer w0.508: C30.1@33.083,99.592 34.644,100.288 ; C30.1@33.374,99.018 34.644,100.288 ; C30.1@33.374,99.145 34.644,100.288 ; C30.1@33.788,98.809 34.644,100.288 ; 35.152,100.288 35.533,100.288 ; R31.2@39.343,98.51 R33.1@39.535,100.659 ; R31.2@39.471,98.544 39.851,100.669 R31.2@40.231,98.544 ; R33.1@39.471,101.016 39.851,98.891 R33.1@40.231,101.016 ; R33.1@39.482,100.955 39.851,100.288 ; R33.1@39.581,101.403 37.34,100.288 ; R31.2@39.603,98.577 R33.1@40.167,100.659 ; R31.2@39.724,98.51 R33.1@39.535,100.659 ; R33.1@39.724,101.05 37.34,100.288 ; R33.1@39.812,100.679 37.34,100.288 ; R31.2@39.851,98.51 R33.1@39.851,101.05 39.851,100.288 ; R31.2@39.978,98.51 R33.1@40.167,100.659 ; R31.2@40.099,98.577 R33.1@39.535,100.659 ; R33.1@40.22,100.955 39.851,100.288 ; R31.2@40.359,98.51 R33.1@40.167,100.659 ; C30.1@33.374,99.678 ccw(c33.374,101.273) 34.501,100.145 ; C30.1@33.374,99.678 ccw(c33.374,101.273) 34.501,100.145 ; C30.1@33.374,99.678 ccw(c33.374,101.273) 34.501,100.145 ; C30.1@33.907,99.145 cw(c34.889,99.145) 34.195,99.839 ; C30.1@33.907,99.145 cw(c34.889,99.145) 34.195,99.839 ; C30.1@33.907,99.145 cw(c34.889,99.145) 34.195,99.839 ; 34.644,100.288 35.533,100.288 ; 35.533,100.288 39.851,100.288 ; 36.965,100.288 ccw(c36.965,103.809) R33.1@39.455,101.319 ; 36.965,100.288 ccw(c36.965,103.809) R33.1@39.455,101.319 ; 36.965,100.288 ccw(c36.965,103.809) R33.1@39.455,101.319 ; 38.191,100.288 ccw(c38.191,102.583) R33.1@39.814,100.96 ; 38.191,100.288 ccw(c38.191,102.583) R33.1@39.814,100.96 ; 38.191,100.288 ccw(c38.191,102.583) R33.1@39.814,100.96 ; 39.417,100.288 ccw(c39.417,101.357) R33.1@40.173,100.601 ; 39.417,100.288 ccw(c39.417,101.357) R33.1@40.173,100.601 ; 39.417,100.288 ccw(c39.417,101.357) R33.1@40.173,100.601 ; R31.2@39.582,98.779 ccw(c38.931,99.43) 39.851,99.43 ; R31.2@39.582,98.779 ccw(c38.931,99.43) 39.851,99.43 ; R31.2@39.582,98.779 ccw(c38.931,99.43) 39.851,99.43 ; R33.1@39.582,100.781 cw(c38.931,100.13) 39.851,100.13 ; R33.1@39.582,100.781 cw(c38.931,100.13) 39.851,100.13 ; R33.1@39.582,100.781 cw(c38.931,100.13) 39.851,100.13 ; 39.851,99.43 ccw(c40.771,99.43) R31.2@40.12,98.779 ; 39.851,99.43 ccw(c40.771,99.43) R31.2@40.12,98.779 ; 39.851,99.43 ccw(c40.771,99.43) R31.2@40.12,98.779 ; 39.851,100.13 cw(c40.771,100.13) R33.1@40.12,100.781 ; 39.851,100.13 cw(c40.771,100.13) R33.1@40.12,100.781 ; 39.851,100.13 cw(c40.771,100.13) R33.1@40.12,100.781 ; 39.851,100.288 cw(c40.422,100.288) 40.08,100.745 ccw(c40.422,100.288) 39.851,100.288 ; 39.851,100.288 ccw(c39.28,100.288) 39.622,100.745 cw(c39.28,100.288) 39.851,100.288
NetC31_2: C31.2 N13.A R59.1 R60.2 | length 94.5
  Top Layer w0.61: R59.1@25.424,66.121 R60.2@25.561,68.573 ; R59.1@25.424,66.129 C31.2@25.561,63.677 ; C31.2@25.552,63.607 25.881,66.049 C31.2@26.21,63.607 ; R59.1@25.552,66.103 25.881,63.661 R59.1@26.21,66.103 ; R59.1@25.552,66.147 25.881,68.589 R59.1@26.21,66.147 ; R60.2@25.552,68.643 25.881,66.201 R60.2@26.21,68.643 ; R59.1@25.681,66.077 C31.2@26.201,63.677 ; R59.1@25.681,66.173 R60.2@26.201,68.573 ; R60.2@25.881,68.665 C31.2@25.881,63.585 N13.A@29.31,63.585 ; C31.2@26.008,63.585 28.472,63.585 ; C31.2@26.03,63.256 28.472,63.585 ; C31.2@26.03,63.914 28.472,63.585 ; R59.1@26.081,66.077 C31.2@25.561,63.677 ; R59.1@26.081,66.173 R60.2@25.561,68.573 ; R59.1@26.338,66.121 R60.2@26.201,68.573 ; R59.1@26.338,66.129 C31.2@26.201,63.677 ; N13.A@29.659,64.206 27.146,63.585 ; N13.A@29.718,63.881 27.146,63.585 ; N13.A@29.735,63.551 27.146,63.585 ; C31.2@25.561,63.677 25.754,66.125 R60.2@25.561,68.573 ; C31.2@25.648,63.818 ccw(c25.084,64.382) 25.881,64.382 ; C31.2@25.648,63.818 ccw(c25.084,64.382) 25.881,64.382 ; C31.2@25.648,63.818 ccw(c25.084,64.382) 25.881,64.382 ; R59.1@25.648,65.892 cw(c25.084,65.328) 25.881,65.328 ; R59.1@25.648,65.892 cw(c25.084,65.328) 25.881,65.328 ; R59.1@25.648,65.892 cw(c25.084,65.328) 25.881,65.328 ; R59.1@25.648,66.358 ccw(c25.084,66.922) 25.881,66.922 ; R59.1@25.648,66.358 ccw(c25.084,66.922) 25.881,66.922 ; R59.1@25.648,66.358 ccw(c25.084,66.922) 25.881,66.922 ; R60.2@25.648,68.432 cw(c25.084,67.868) 25.881,67.868 ; R60.2@25.648,68.432 cw(c25.084,67.868) 25.881,67.868 ; R60.2@25.648,68.432 cw(c25.084,67.868) 25.881,67.868 ; 25.881,64.382 ccw(c26.678,64.382) C31.2@26.114,63.818 ; 25.881,64.382 ccw(c26.678,64.382) C31.2@26.114,63.818 ; 25.881,64.382 ccw(c26.678,64.382) C31.2@26.114,63.818 ; 25.881,65.328 cw(c26.678,65.328) R59.1@26.114,65.892 ; 25.881,65.328 cw(c26.678,65.328) R59.1@26.114,65.892 ; 25.881,65.328 cw(c26.678,65.328) R59.1@26.114,65.892 ; 25.881,66.922 ccw(c26.678,66.922) R59.1@26.114,66.358 ; 25.881,66.922 ccw(c26.678,66.922) R59.1@26.114,66.358 ; 25.881,66.922 ccw(c26.678,66.922) R59.1@26.114,66.358 ; 25.881,67.868 cw(c26.678,67.868) R60.2@26.114,68.432 ; 25.881,67.868 cw(c26.678,67.868) R60.2@26.114,68.432 ; 25.881,67.868 cw(c26.678,67.868) R60.2@26.114,68.432 ; C31.2@26.201,63.677 26.008,66.125 R60.2@26.201,68.573 ; C31.2@26.241,63.352 cw(c26.805,62.788) 26.805,63.585 ; C31.2@26.241,63.352 cw(c26.805,62.788) 26.805,63.585 ; C31.2@26.241,63.352 cw(c26.805,62.788) 26.805,63.585 ; C31.2@26.241,63.818 ccw(c26.805,64.382) 26.805,63.585 ; C31.2@26.241,63.818 ccw(c26.805,64.382) 26.805,63.585 ; C31.2@26.241,63.818 ccw(c26.805,64.382) 26.805,63.585 ; 28.206,63.585 ccw(c28.206,65.393) 29.485,64.114 cw(c28.206,65.393) 28.206,63.585
NetC33_1: C33.1 N8.2 R51.1 R54.1 R145.2 | length 65.5
  Top Layer w0.61: N8.2@54.075,88.35 N8.2@54.075,88.985 ; N8.2@54.075,89.696 54.075,90.636 ; C33.1@56.544,85.344 55.528,86.36 55.528,86.364 54.292,87.6 54.292,87.608 ; C33.1@56.62,85.371 58.891,83.1 R145.2@58.9,83.1 ; 74.55,89.62 73.9,89.62 ; 88.293,89.607 88.28,89.62 ; v9@89.617,91.917 cw(c89.053,91.353) 89.85,91.353 cw(c90.647,91.353) v9@90.083,91.917 ; v9(89.85,92.15) 89.85,90.8 88.67,89.62 88.28,89.62 ; 54.075,87.825 54.292,87.608 ; 54.075,87.825 N8.2@54.075,88.985 ; 54.075,87.825 N8.2@54.075,88.274 ; 54.075,87.825 N8.2@54.075,88.274 ; N8.2@54.075,88.274 54.292,87.608 ; N8.2@54.075,88.985 54.075,90.636 ; 54.075,90.636 55.345,91.906 59.917,91.906 62.203,89.62 73.9,89.62 ; 73.9,89.62 88.28,89.62 ; 55.664,86.224 ccw(c56.62,87.181) 56.62,85.828 cw(c56.62,87.181) 55.664,86.224 ; C33.1@56.62,84.914 cw(c56.62,83.81) 57.4,84.591 ccw(c56.62,83.81) C33.1@56.62,84.914 ; 58.156,83.835 ccw(c58.928,84.607) 58.928,83.515 cw(c58.928,84.607) 58.156,83.835
  Bottom Layer w0.61: v2(51.8,85.9) 51.8,85.4 53,84.2 ; 53.1,84.1 55.4,84.1 v2(56.6,85.3)
NetC33_2: C33.2 N8.1 R48.2 R54.2 | length 90.2
  Top Layer w0.61: R48.2@25.881,83.778 26.759,82.9 ; R48.2@25.928,83.458 28.826,82.9 ; R48.2@26.124,84.087 28.826,82.9 ; 27.48,82.889 cw(c27.48,85.25) R48.2@25.81,83.58 ; 28.951,82.889 cw(c28.951,86.721) R48.2@26.241,84.011 ; v3(36.6,82.9) 26.759,82.9 ; R54.2@51.568,82.718 53.1,81.5 ; R54.2@51.794,82.958 53.1,81.5 ; R54.2@52.058,83.157 53.1,81.5 ; N8.1@52.8,88.2 52.8,87.4 ; N8.1@52.805,88.274 52.8,87.4 ; C33.2@56.373,83.178 55.1,81.5 ; C33.2@56.5,82.9 55.1,81.5 ; C33.2@56.62,82.958 55.1,81.5 ; C33.2@56.829,82.703 55.1,81.5 ; R48.2@25.81,83.58 ccw(c27.453,85.223) 27.453,82.9 cw(c27.453,85.223) R48.2@25.81,83.58 ; R48.2@26.008,83.778 26.759,82.9 ; R48.2@26.008,83.778 28.826,82.9 ; R48.2@26.008,83.778 26.759,82.9 ; R48.2@26.241,84.011 ccw(c28.925,86.695) 28.925,82.9 cw(c28.925,86.695) R48.2@26.241,84.011 ; R48.2@26.338,83.778 ccw(c27.442,83.778) 26.661,82.998 ; R48.2@26.338,83.778 ccw(c27.442,83.778) 26.661,82.998 ; R48.2@26.338,83.778 ccw(c27.442,83.778) 26.661,82.998 ; 26.759,82.9 26.287,83.955 26.759,82.9 ; 26.759,82.9 25.79,83.53 26.759,82.9 ; 52.8,87.4 53.1,87.1 53.1,86.085 53.114,86.071 53.114,84.405 R54.2@51.794,83.085 51.794,82.806 53.1,81.5 ; 53.1,81.5 55.1,81.5 ; R54.2@51.794,83.542 ccw(c51.794,84.646) 52.574,83.865 cw(c51.794,84.646) R54.2@51.794,83.542 ; R54.2@52.124,82.958 ccw(c53.288,82.958) 52.465,82.135 cw(c53.288,82.958) R54.2@52.124,82.958 ; 55.95,82.35 cw(c56.62,81.681) 56.62,82.628 ccw(c56.62,81.681) 55.95,82.35 ; C33.2@56.1,82.5 ccw(c55.642,82.958) 56.29,82.958 cw(c55.642,82.958) C33.2@56.1,82.5
  Bottom Layer w0.61: v3(36.6,82.9) v2@51.8,82.9
  other v2: 51.6,82.7
NetC35_2: C35.2 Q1.2 Q2.2 Q3.2 Q4.2 R14.1 V9.C | length 69.8
  Top Layer w0.61: R14.1@42.25,44.928 43.8,44.2 ; R14.1@42.418,44.882 cw(c42.418,43.191) 43.613,44.387 ; R14.1@42.418,45.212 43.8,44.2 ; R14.1@42.638,45.458 43.8,44.2 ; R14.1@42.788,45.212 43.8,44.2 ; 50.25,44.45 ccw(c49.066,45.633) Q3.2@50.74,45.633 ; Q3.2@50.81,45.874 50,44.2 ; Q3.2@51.185,45.633 50,44.2 ; Q3.2@51.3,45.5 50,44.2 ; Q3.2@51.492,45.31 50,44.2 ; 43.8,44.2 50,44.2
  Top Layer w0.8: C35.2@52.705,63.246 54,63.2 ; C35.2@52.8,63.2 54,63.2 ; C35.2@52.871,63.412 ccw(c53.383,63.924) 53.383,63.2 ; v2(54.2,55.2) 54.2,63 ; 54,63.2 56.642,65.842 ; 56.642,65.842 V9.C@56.642,67.234 56.642,65.842
  Bottom Layer w0.71: Q3.2@51.435,45.633 57.6,45.633 64.167,45.633 Q2.2@64.2,45.6 ; Q4.2@56.028,45.292 cw(c56.853,44.467) 56.853,45.633 ; Q4.2@56.028,45.85 ccw(c56.553,46.375) 56.553,45.633 ; 58.463,45.633 cw(c58.463,44.467) Q1.2@59.288,45.292 ; 58.763,45.633 ccw(c58.763,46.375) Q1.2@59.288,45.85 ; Q1.2@60.346,45.292 cw(c61.171,44.467) 61.171,45.633 ; Q1.2@60.346,45.85 ccw(c60.871,46.375) 60.871,45.633 ; 62.781,45.633 cw(c62.781,44.467) Q2.2@63.606,45.292 ; 63.081,45.633 ccw(c63.081,46.375) Q2.2@63.606,45.85
  Bottom Layer w0.8: v2@54.3,55.1 54.3,54.2 57.6,50.9 57.6,45.633
  other v2: 56.9,67.3
NetC110_1: C110.1 N9.6 R73.1 R74.1 R143.2 | length 54
  Top Layer w0.76: R73.1@24.226,38.729 26.093,37.4 ; R73.1@24.472,39.021 26.093,37.4 ; R73.1@24.764,39.267 26.093,37.4 ; R143.2@35.56,36.195 R143.2@35.595,36.195 ; R143.2@35.6,36.2 R143.2@35.595,36.195 ; R143.2@35.687,36.195 38.021,38.321 ; 37.653,37.953 R74.1@39.878,40.132 ; C110.1@39.751,42.6 C110.1@40.005,42.6 ; R74.1@39.9,40.2 35.895,36.195 R143.2@35.595,36.195 ; C110.1@40.005,42.605 C110.1@40.005,42.6 ; C110.1@40.1,42.6 C110.1@40.005,42.6 ; R73.1@25.125,38.368 cw(c25.777,39.021) 24.854,39.021 ccw(c25.777,39.021) R73.1@25.125,38.368 ; R73.1@25.125,38.368 ccw(c24.472,37.716) 24.472,38.639 cw(c24.472,37.716) R73.1@25.125,38.368 ; 26.093,37.4 29.4,37.4 32,34.8 34.2,34.8 R143.2@35.595,36.195 ; C110.1@40.005,42.418 R74.1@40.005,40.132 C110.1@40.005,42.418 ; C110.1@40.005,42.418 C110.1@40.005,42.6 ; 34.883,35.483 ccw(c34.171,36.195) 35.178,36.195 cw(c34.171,36.195) 34.883,35.483 ; R143.2@35.687,36.45 ccw(c35.687,37.568) 36.477,36.777 cw(c35.687,37.568) R143.2@35.687,36.45 ; N9.6@37.236,42.545 39.298,42.6 37.3,42.6 39.878,42.418 N9.6@37.236,42.545 ; 38.823,42.6 cw(c38.823,41.363) 39.698,42.238 ccw(c38.823,41.363) 38.823,42.6 ; R74.1@39.364,39.664 cw(c39.878,39.15) 39.878,39.877 ccw(c39.878,39.15) R74.1@39.364,39.664
NetC110_2: C110.2 N9.7 R49.2 R74.2 | length 32.3
  Top Layer w0.635: R49.2@35.5,47.6 34.989,47.088 34.989,44.701 35.989,43.7 N9.7@36.1,43.7 ; N9.7@36.576,43.815 40.885,43.815 ; N9.7@37.236,43.815 39.497,43.815 ; C110.2@42.164,42.418 40.885,43.815 ; C110.2@42.3,42.5 C110.2@42.3,42.4 ; 40.885,43.815 C110.2@42.3,42.4 ; R74.2@42.291,40.132 R74.2@42.3,40.141 ; R74.2@42.291,40.132 C110.2@42.3,42.4 ; R74.2@42.291,40.132 C110.2@42.291,42.418 R74.2@42.3,40.141 ; R74.2@42.3,40.141 C110.2@42.3,42.4 ; 34.989,46.705 cw(c35.972,46.705) 35.277,47.4 ccw(c35.972,46.705) 34.989,46.705 ; 41.539,43.161 cw(c40.795,42.418) 41.847,42.418 ccw(c40.795,42.418) 41.539,43.161 ; R74.2@42.066,40.357 ccw(c41.503,40.92) 42.3,40.92 cw(c41.503,40.92) R74.2@42.066,40.357 ; C110.2@42.066,42.193 cw(c41.503,41.63) 42.3,41.63 ccw(c41.503,41.63) C110.2@42.066,42.193 ; 42.3,40.877 ccw(c43.036,40.877) 42.516,40.357 cw(c43.036,40.877) 42.3,40.877 ; 42.3,41.673 cw(c43.036,41.673) 42.516,42.193 ccw(c43.036,41.673) 42.3,41.673
NetC111_1: C111.1 N3.6 R7.2 R12.1 R144.1 | length 73.8
  Top Layer w0.61: R12.1@25.8,73.488 27.786,72.094 ; R12.1@25.881,73.745 26.135,73.745 27.786,72.094 ; R12.1@26.008,73.745 27.786,72.094 ; R12.1@26.249,73.971 27.786,72.094 ; R7.2@42.059,75.887 43.28,75.65 ; R7.2@42.164,76.2 43.28,75.65 ; R7.2@42.348,76.474 43.28,75.65 ; R7.2@42.412,75.925 cw(c40.315,73.828) 43.28,73.828 ; R7.2@42.645,76.285 43.28,75.65 ; 42.843,76.356 cw(c41.787,75.3) 43.28,75.3 ; 43.064,71.243 ccw(c42.524,71.783) N3.6@43.28,71.891 ; N3.6@43.28,73.313 43.28,75.447 ; R12.1@26.008,73.415 cw(c26.008,72.311) 26.788,73.092 ; R12.1@26.008,73.415 cw(c26.008,72.311) 26.788,73.092 ; R12.1@26.008,73.415 cw(c26.008,72.311) 26.788,73.092 ; 27.786,72.094 38.835,72.094 40.359,70.57 42.391,70.57 ; 42.391,70.57 43.28,71.459 ; 42.391,70.57 N3.6@43.28,71.891 ; 42.975,71.154 ccw(c42.238,71.891) N3.6@43.28,71.891 ; 42.975,71.154 ccw(c42.238,71.891) N3.6@43.28,71.891 ; 42.975,71.154 ccw(c42.238,71.891) N3.6@43.28,71.891 ; 43.28,71.459 N3.6@43.28,72.602 43.28,75.65 ; 43.28,71.459 N3.6@43.28,71.891 ; 43.28,71.459 N3.6@43.28,71.891
  Top Layer w0.76: v3@46.99,72 R144.1@46.99,76.327 ; 46.99,73.285 R144.1@46.99,76.2
  Top Layer w1.27: R7.2@42.164,76.327 39.927,76.327 R7.2@42.164,76.327 ; R7.2@42.164,76.327 C111.1@39.878,76.327 R7.2@42.164,76.327
  Bottom Layer w0.61: v3(38.6,72.1) 46.9,72.1 v3(47,72)
NetD1_1: D1.1 R50.1 V18.E | length 35.7
  Top Layer w0.61: D1.1@24.026,91.348 25.881,92.795 ; D1.1@24.103,91.017 25.881,92.795 ; D1.1@24.341,91.017 25.881,92.795 ; V18.E@24.484,99.145 24.484,98.116 25.881,96.719 ; D1.1@24.714,90.753 25.881,92.795 ; R50.1@25.552,95.313 25.881,92.871 R50.1@26.21,95.313 ; R50.1@25.553,95.374 25.881,96.719 ; R50.1@26.209,95.374 25.881,96.719 ; D1.1@24.798,91.017 cw(c26.477,91.017) 25.29,92.204 ; D1.1@24.798,91.017 cw(c26.477,91.017) 25.29,92.204 ; D1.1@24.798,91.017 cw(c26.477,91.017) 25.29,92.204 ; R50.1@25.648,95.102 cw(c25.084,94.538) 25.881,94.538 ; R50.1@25.648,95.102 cw(c25.084,94.538) 25.881,94.538 ; R50.1@25.648,95.102 cw(c25.084,94.538) 25.881,94.538 ; R50.1@25.648,95.568 ccw(c25.084,96.132) 25.881,96.132 ; R50.1@25.648,95.568 ccw(c25.084,96.132) 25.881,96.132 ; R50.1@25.648,95.568 ccw(c25.084,96.132) 25.881,96.132 ; 25.881,92.795 R50.1@25.881,95.335 25.881,96.719 ; 25.881,94.538 cw(c26.678,94.538) R50.1@26.114,95.102 ; 25.881,94.538 cw(c26.678,94.538) R50.1@26.114,95.102 ; 25.881,94.538 cw(c26.678,94.538) R50.1@26.114,95.102 ; 25.881,96.132 ccw(c26.678,96.132) R50.1@26.114,95.568 ; 25.881,96.132 ccw(c26.678,96.132) R50.1@26.114,95.568 ; 25.881,96.132 ccw(c26.678,96.132) R50.1@26.114,95.568
NetD1_2: D1.2 R53.2 | length 45.8
  Top Layer w0.61: D1.2@24.103,87.588 25.138,87.588 ; D1.2@24.114,87.985 26.817,89.267 ; D1.2@24.626,87.23 26.817,89.267 ; R53.2@29.638,95.136 28.662,95.462 ; R53.2@29.638,95.788 28.662,95.462 ; R53.2@29.691,95.462 28.662,95.462 ; R53.2@29.818,95.462 28.662,95.462 ; D1.2@24.341,87.436 ccw(c24.341,88.992) 25.441,87.891 ; D1.2@24.341,87.436 ccw(c24.341,88.992) 25.441,87.891 ; D1.2@24.341,87.436 ccw(c24.341,88.992) 25.441,87.891 ; D1.2@24.341,87.588 25.138,87.588 ; D1.2@24.341,87.588 26.817,89.267 ; D1.2@24.341,87.588 25.138,87.588 ; D1.2@24.341,88.045 ccw(c24.341,91.073) 26.482,88.932 ; D1.2@24.341,88.045 ccw(c24.341,91.073) 26.482,88.932 ; D1.2@24.341,88.045 ccw(c24.341,91.073) 26.482,88.932 ; D1.2@24.736,87.357 cw(c25.138,87.122) 25.138,87.588 ; D1.2@24.736,87.357 cw(c25.138,87.122) 25.138,87.588 ; D1.2@24.736,87.357 cw(c25.138,87.122) 25.138,87.588 ; D1.2@24.736,87.819 ccw(c25.138,88.054) 25.138,87.588 ; D1.2@24.736,87.819 ccw(c25.138,88.054) 25.138,87.588 ; D1.2@24.736,87.819 ccw(c25.138,88.054) 25.138,87.588 ; 25.138,87.588 27.2,89.65 27.2,94 28.662,95.462 ; 25.138,87.588 24.472,88.026 25.138,87.588 ; 25.138,87.588 24.472,87.15 25.138,87.588 ; 28.894,95.462 cw(c28.894,94.665) R53.2@29.458,95.229 ; 28.894,95.462 ccw(c28.894,96.259) R53.2@29.458,95.695 ; 28.894,95.462 cw(c28.894,94.665) R53.2@29.458,95.229 ; 28.894,95.462 ccw(c28.894,96.259) R53.2@29.458,95.695 ; 28.894,95.462 ccw(c28.894,96.259) R53.2@29.458,95.695 ; 28.894,95.462 cw(c28.894,94.665) R53.2@29.458,95.229
NetD2_1: D2.1 R76.2 | length 51.6
  Top Layer w0.61: D2.1@16.053,59.599 R76.2@16.17,56.998 ; D2.1@16.055,59.533 R76.2@16.54,56.988 ; D2.1@16.055,59.538 R76.2@16.515,56.988 ; D2.1@16.066,59.469 R76.2@16.91,57.004 ; R76.2@16.148,56.846 D2.1@16.515,59.348 ; D2.1@16.16,58.833 cw(c15.302,57.975) 16.515,57.975 ; R76.2@16.236,56.548 ccw(c15.561,57.223) 16.515,57.223 ccw(c17.469,57.223) R76.2@16.794,56.548 ; R76.2@16.515,56.219 D2.1@16.515,59.362 ; 16.515,58.129 cw(c17.51,58.129) D2.1@16.806,58.833 ; R76.2@16.542,56.819 D2.1@16.515,59.348 ; R76.2@16.936,56.854 D2.1@16.515,59.348 ; D2.1@16.956,59.48 R76.2@16.17,56.998 ; D2.1@16.965,59.54 R76.2@16.515,56.988 ; D2.1@16.966,59.544 R76.2@16.54,56.988 ; D2.1@16.966,59.609 R76.2@16.91,57.004 ; R76.2@16.17,56.998 D2.1@16.51,59.579 ; D2.1@16.51,59.579 R76.2@16.515,56.988 ; D2.1@16.51,59.579 R76.2@16.54,56.988 ; D2.1@16.51,59.579 R76.2@16.91,57.004 ; D2.1@16.187,59.256 cw(c15.394,58.463) 16.515,58.463 ccw(c15.394,58.463) D2.1@16.187,59.256 ; R76.2@16.263,57.098 ccw(c15.653,57.708) 16.515,57.708 cw(c15.653,57.708) R76.2@16.263,57.098 ; 16.515,57.838 ccw(c17.561,57.838) 16.821,57.098 cw(c17.561,57.838) 16.515,57.838 ; 16.515,58.487 cw(c17.602,58.487) 16.833,59.256 ccw(c17.602,58.487) 16.515,58.487
NetN2_1: N2.1 R8.2 R15.2 | length 41.4
  Top Layer w0.61: R8.2@47.407,63.548 N2.1@48.36,66.314 ; 47.627,64.186 N2.1@48.36,66.303 ; R8.2@47.725,63.458 N2.1@48.36,66.314 ; 47.884,64.173 N2.1@48.36,66.303 ; R8.2@47.994,63.6 48.36,63.966 N2.1@48.36,67.014 ; R8.2@48.051,63.405 N2.1@48.36,66.314 ; 48.132,64.17 N2.1@48.36,66.303 ; 48.36,64.169 N2.1@48.36,66.303 ; R8.2@47.492,63.691 ccw(c45.395,65.788) 48.36,65.788 ; R8.2@47.492,63.691 ccw(c45.395,65.788) 48.36,65.788 ; R8.2@47.492,63.691 ccw(c45.395,65.788) 48.36,65.788 ; R8.2@47.923,63.26 ccw(c46.867,64.316) 48.36,64.316 ; R8.2@47.923,63.26 ccw(c46.867,64.316) 48.36,64.316 ; R8.2@47.923,63.26 ccw(c46.867,64.316) 48.36,64.316
  Top Layer w1.27: R8.2@47.725,63.331 50.419,63.246 48.054,63.246 R15.2@50.292,63.373 R8.2@47.725,63.331
NetN2_6: N2.6 N13.C R20.2 R24.2 | length 50.4
  Top Layer w0.61: N13.C@37.338,63.881 38.3,64 ; N13.C@37.354,64.211 38.3,64 ; N13.C@37.434,63.565 38.3,64 ; R24.2@37.565,67.141 39.257,67.141 ; R24.2@37.597,66.812 39.257,67.141 ; R24.2@37.597,67.47 39.257,67.141 ; N13.C@37.7,64 38.3,64 ; R24.2@38.073,67.141 39.257,67.141 ; N2.6@50.9,71.891 50.9,69.935 ; N2.6@50.9,73.313 50.9,74.7 ; R20.2@51.546,76.385 R20.2@51.8,76.131 ; R20.2@51.669,76.34 50.9,74.7 ; R20.2@51.954,76.173 50.9,74.7 ; R20.2@52,75.8 50.9,74.7 ; R20.2@52.204,75.957 50.9,74.7 ; R24.2@37.798,66.908 cw(c38.362,66.344) 38.362,67.141 ; R24.2@37.798,66.908 cw(c38.362,66.344) 38.362,67.141 ; R24.2@37.798,66.908 cw(c38.362,66.344) 38.362,67.141 ; R24.2@37.798,67.374 ccw(c38.362,67.938) 38.362,67.141 ; R24.2@37.798,67.374 ccw(c38.362,67.938) 38.362,67.141 ; R24.2@37.798,67.374 ccw(c38.362,67.938) 38.362,67.141 ; 38.3,64 ccw(c38.3,63.076) 37.591,63.669 cw(c38.3,63.076) 38.3,64 ; 38.3,64 39.416,65.116 39.416,68.434 39.391,68.459 39.775,68.843 49.808,68.843 50.9,69.935 ; 50.9,69.935 N2.6@50.9,72.602 50.9,74.7 ; 51.11,74.91 ccw(c49.868,76.151) 51.624,76.17 cw(c49.868,76.151) 51.11,74.91
NetN3_1: N3.1 N3.2 R57.2 | length 19.1
  Top Layer w0.61: R57.2@40.105,63.331 40.74,63.966 N3.1@40.74,67.014 ; 40.74,64.169 N3.1@40.74,66.303 ; R57.2@39.872,63.691 ccw(c37.775,65.788) 40.74,65.788 ; R57.2@39.872,63.691 ccw(c37.775,65.788) 40.74,65.788 ; R57.2@39.872,63.691 ccw(c37.775,65.788) 40.74,65.788 ; R57.2@40.303,63.26 ccw(c39.247,64.316) 40.74,64.316 ; R57.2@40.303,63.26 ccw(c39.247,64.316) 40.74,64.316 ; R57.2@40.303,63.26 ccw(c39.247,64.316) 40.74,64.316 ; N3.1@40.74,67.014 N3.2@42.01,67.014 N3.1@40.74,67.014
NetN3_3: N3.3 R58.1 | length 31.9
  Top Layer w0.61: R58.1@42.327,63.548 N3.3@43.28,66.314 ; 42.547,64.186 N3.3@43.28,66.303 ; R58.1@42.645,63.331 43.28,63.966 N3.3@43.28,67.014 ; R58.1@42.645,63.458 N3.3@43.28,66.314 ; 42.804,64.173 N3.3@43.28,66.303 ; R58.1@42.971,63.405 N3.3@43.28,66.314 ; 43.052,64.17 N3.3@43.28,66.303 ; 43.28,64.169 N3.3@43.28,66.303 ; R58.1@42.412,63.691 ccw(c40.315,65.788) 43.28,65.788 ; R58.1@42.412,63.691 ccw(c40.315,65.788) 43.28,65.788 ; R58.1@42.412,63.691 ccw(c40.315,65.788) 43.28,65.788 ; R58.1@42.843,63.26 ccw(c41.787,64.316) 43.28,64.316 ; R58.1@42.843,63.26 ccw(c41.787,64.316) 43.28,64.316 ; R58.1@42.843,63.26 ccw(c41.787,64.316) 43.28,64.316
NetN3_5: N3.5 R13.1 R19.1 R144.2 | length 53.7
  Top Layer w0.61: R13.1@25.881,71.205 38.454,71.205 39.953,69.706 43.051,69.706 44.55,71.205 ; R19.1@44.247,76.181 44.55,73.736 ; R19.1@44.247,76.182 44.55,73.734 ; R19.1@44.252,76.139 44.55,75.447 ; N3.5@44.55,71.891 44.55,71.205 ; N3.5@44.55,73.313 44.55,75.447 ; R19.1@44.55,75.65 N3.5@44.55,72.602 44.55,71.205 ; R19.1@44.896,76.116 44.55,75.447 ; R13.1@26.241,70.972 cw(c26.805,70.408) 26.805,71.205 ; R13.1@26.241,70.972 cw(c26.805,70.408) 26.805,71.205 ; R13.1@26.241,70.972 cw(c26.805,70.408) 26.805,71.205 ; R13.1@26.241,71.438 ccw(c26.805,72.002) 26.805,71.205 ; R13.1@26.241,71.438 ccw(c26.805,72.002) 26.805,71.205 ; R13.1@26.241,71.438 ccw(c26.805,72.002) 26.805,71.205 ; 44.55,73.734 44.906,76.174 44.55,73.736 ; 44.55,73.734 R19.1@44.577,76.2 ; 44.55,73.736 R19.1@44.577,76.2 ; 44.55,75.447 R19.1@44.577,76.2 ; R19.1@44.344,75.967 cw(c43.845,75.468) 44.55,75.468 ccw(c43.845,75.468) R19.1@44.344,75.967 ; 44.55,75.338 cw(c45.439,75.338) 44.81,75.967 ccw(c45.439,75.338) 44.55,75.338
  Bottom Layer w0.61: v3(44.6,76.4) v2(46.9,78.7)